# EAGLE board Test (EAGLE 8.2.2)
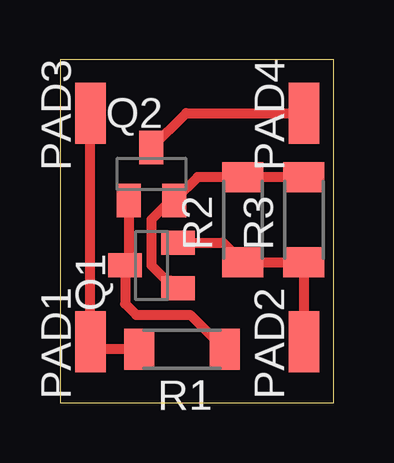
[diagram p0: board, top side]

Size 11.41 x 14.28 mm. Coordinates in mm from the lower left corner, seen from the top.
Outline: 0,0 11.41,0 11.41,14.28 0,14.28 0,0
Copper layers (1*16): Top 0.035mm / dielectric 1.5mm / Bottom 0.035mm
Design rules "default": minimum track width 6mil, minimum drill 0.35mm, track to track 6mil, track to pad 6mil, pad to pad 6mil, via to via 6mil, smd to smd 6mil, copper to edge 40mil, drill to drill 6mil, minimum pad ring 10mil, minimum via ring 8mil, stop-mask expansion 4mil, vias tented up to drill 0mil, thermal gap 10mil

## Footprints (pad centres in the part's own frame; a part is rotated, then mirrored left to right if it is on the bottom)
SMD1,27-2,54 = smd 1.27 x 2.54: 1 0,0
SOT23-BEC = smd 1 x 1.4: B -0.95,-1.1; C 0,1.1; E 0.95,-1.1
R1206 = smd 1.25 x 1.7: 1 -1.775,0; 2 1.775,0

## Placement (x,y rotation side)
PAD1  [SMD1,27-2,54]  1.27,2.54 0 top
PAD2  [SMD1,27-2,54]  10.16,2.54 0 top
PAD3  [SMD1,27-2,54]  1.27,12.06 0 top
PAD4  [SMD1,27-2,54]  10.16,12.06 0 top
Q1  BC817-40LT1SMD  [SOT23-BEC]  3.81,5.71 90 top
Q2  BC817-40LT1SMD  [SOT23-BEC]  3.81,9.53 0 top
R1  30R  [R1206]  5.08,2.22 180 top
R2  10R  [R1206]  7.62,7.62 90 top
R3  10R  [R1206]  10.16,7.62 90 top

## Library data of the parts
PAD1-PAD4 = wirepad
Q1 Q2 = transistor-npn
R1-R3 = Namenlos

## Nets
N$1: PAD1.1 PAD3.1 R1.2
N$2: Q1.C Q2.B R1.1
N$3: PAD4.1 Q2.C
N$4: PAD2.1 Q1.E R2.1 R3.1
N$5: Q1.B Q2.E R2.2 R3.2

## Tracks (layer width: path | path; a pad name or v marks a point on that pad's centre or on a via)
N$1
  Top 0.406: R1.2 1.59,2.22 PAD1.1 PAD3.1
N$2
  Top 0.406: Q2.B 2.86,5.87 Q1.C 2.71,4.12 3.17,3.65 5.43,3.65 R1.1
N$3
  Top 0.406: Q2.C 5.25,12.06 PAD4.1
N$4
  Top 0.406: Q1.E 6.8,6.67 R2.1 R3.1 PAD2.1
N$5
  Top 0.406: Q1.B 4.59,5.08 4.45,5.08 3.81,5.71 3.81,7.62 4.62,8.43 Q2.E 5.73,9.39 R2.2 R3.2